# EAGLE board Xbee pcb (EAGLE 9.3.0)
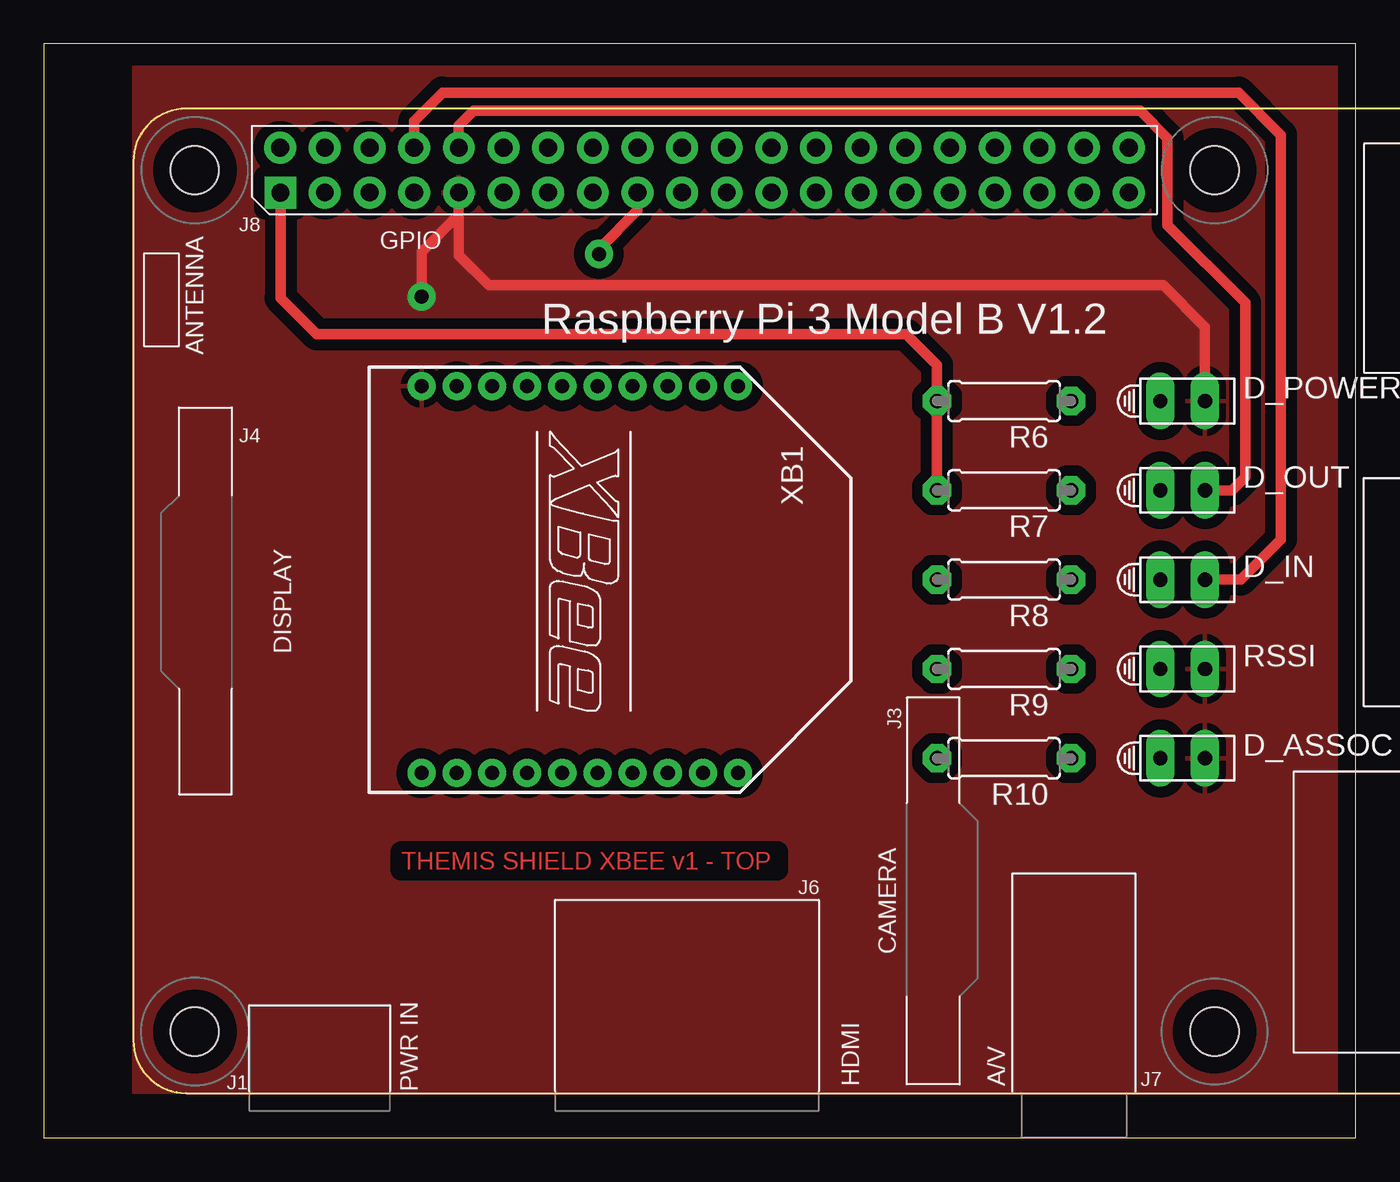
[diagram p0: board, top side]
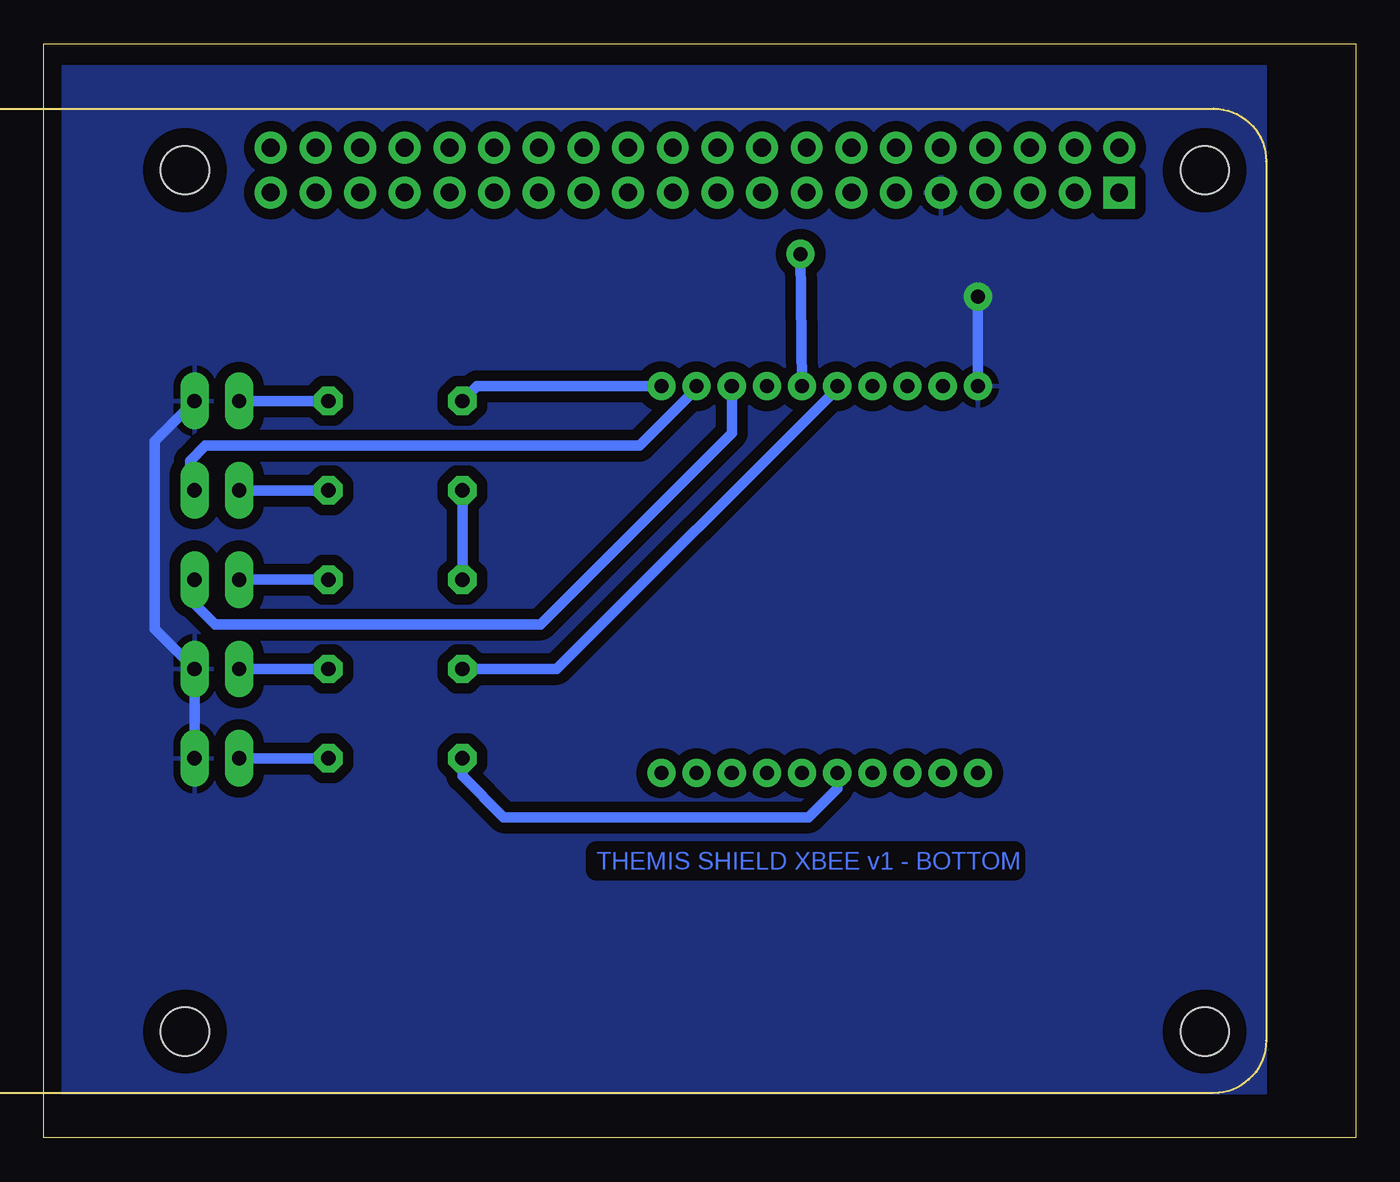
[diagram p1: board, bottom side, seen from below]

Size 74.6 x 62.22 mm. Coordinates in mm from the lower left corner, seen from the top.
Outline: 0,0 74.6,0 74.6,62.22 0,62.22 0,0
Copper layers (1*16): Top 0.035mm / dielectric 1.5mm / Bottom 0.035mm
Design rules "ENSEA_2019": minimum track width 0.4mm, minimum drill 0.6mm, track to track 0.4mm, track to pad 0.4mm, pad to pad 0.4mm, via to via 0.4mm, smd to smd 0.4mm, copper to edge 1mm, drill to drill 0.4mm, minimum pad ring 0.4mm, minimum via ring 0.4mm, stop-mask expansion 4mil, vias tented up to drill 0mil, thermal gap 0.4mm
Net classes: 0 default: width 0.203 mm

## Footprints (pad centres in the part's own frame; a part is rotated, then mirrored left to right if it is on the bottom)
HLMP6 = drill 0.813 long: A -1.27,0; K 1.27,0
RPI3 = drill 1.016 square: P$1 8.37,51.23 | drill 1.016: P$2 8.357,53.772; P$3 10.897,51.232; P$4 10.897,53.772; P$5 13.437,51.232; P$6 13.437,53.772; P$7 15.977,51.232; P$8 15.977,53.772; P$9 18.517,51.232; P$10 18.517,53.772; P$11 21.057,51.232; P$12 21.057,53.772; P$13 23.597,51.232; P$14 23.597,53.772; P$15 26.137,51.232; P$16 26.137,53.772; P$17 28.677,51.232; P$18 28.677,53.772; P$19 31.217,51.232; P$20 31.217,53.772; P$21 33.757,51.232; P$22 33.757,53.772; P$23 36.297,51.232; P$24 36.297,53.772; P$25 38.837,51.232; P$26 38.837,53.772; P$27 41.377,51.232; P$28 41.377,53.772; P$29 43.917,51.232; P$30 43.917,53.772; P$31 46.457,51.232; P$32 46.457,53.772; P$33 48.997,51.232; P$34 48.997,53.772; P$35 51.537,51.232; P$36 51.537,53.772; P$37 54.077,51.232; P$38 54.077,53.772; P$39 56.617,51.232; P$40 56.617,53.772 | hole 2.75: 3.5,3.5; 61.5,3.5; 3.5,52.5; 61.5,52.5
0207/7 = drill 0.813 octagon: 1 -3.81,0; 2 3.81,0
XBEE = drill 0.8 pad 1.27: 1 -11,9; 2 -11,7; 3 -11,5; 4 -11,3; 5 -11,1; 6 -11,-1; 7 -11,-3; 8 -11,-5; 9 -11,-7; 10 -11,-9; 11 11,-9; 12 11,-7; 13 11,-5; 14 11,-3; 15 11,-1; 16 11,1; 17 11,3; 18 11,5; 19 11,7; 20 11,9

## Placement (x,y rotation side)
D_ASSOC  HLMP6  [HLMP6]  64.77,21.59 0 top
D_IN  HLMP6  [HLMP6]  64.77,31.75 0 top
D_OUT  HLMP6  [HLMP6]  64.77,36.83 0 top
D_POWER  HLMP6  [HLMP6]  64.77,41.91 0 top
PCB1  RPI3RPI3  [RPI3]  5.08,2.54 0 top
R6  330  [0207/7]  54.61,41.91 180 top
R7  330  [0207/7]  54.61,36.83 180 top
R8  330  [0207/7]  54.61,31.75 180 top
R9  330  [0207/7]  54.61,26.67 180 top
R10  330  [0207/7]  54.61,21.59 180 top
RSSI  HLMP6  [HLMP6]  64.77,26.67 0 top
XB1  XBEE  [XBEE]  30.48,31.75 270 top

## Library data of the parts
D_ASSOC D_IN D_OUT D_POWER RSSI = display-hp; MF: AGILENT TECHNOLOGIES; MPN: HLMP-6500; OC_FARNELL: 1652490; OC_NEWARK: 40K0088
PCB1 = e14_Rpi3_RevA+mirror-pcb
R6-R10 = rcl; SPICEPREFIX: R
XB1 = maxstream; MPN: XBP24-Z7UIT-004; OC_FARNELL: 1751799; OC_NEWARK: 34R5507

## Nets
ASSOC: R10.2 XB1.15
DIN: D_IN.K PCB1.P$8 XB1.3
DOUT: D_OUT.K PCB1.P$10 XB1.2
GND: D_ASSOC.K D_POWER.K PCB1.P$9 RSSI.K XB1.10
N$5: PCB1.P$17 XB1.5
N$6: D_ASSOC.A R10.1
N$7: D_OUT.A R7.1
N$8: D_POWER.A R6.1
N$9: R9.1 RSSI.A
N$12: D_IN.A R8.1
RSSI: R9.2 XB1.6
VCC: PCB1.P$1 R6.2 R7.2 R8.2 XB1.1

## Tracks (layer width: path | path; a pad name or v marks a point on that pad's centre or on a via)
ASSOC
  Bottom 0.61: R10.2 50.8,20.57 48.45,18.23 31.11,18.23 29.48,19.86 XB1.15
DIN
  Top 0.61: PCB1.P$8 21.06,57.84 22.67,59.45 67.95,59.45 70.36,57.04 70.36,34.04 68.07,31.75 D_IN.K
  Bottom 0.61: D_IN.K 66.04,30.38 64.87,29.21 46.35,29.21 35.48,40.08 XB1.3
DOUT
  Top 0.61: PCB1.P$10 23.6,57.58 24.43,58.42 62.35,58.42 63.9,56.87 63.9,51.92 68.33,47.5 68.33,37.59 67.56,36.83 D_OUT.K
  Bottom 0.61: XB1.2 37.48,42.62 40.73,39.37 65.43,39.37 66.29,38.5 66.29,37.08 D_OUT.K
GND  (via drill 0.8)
  Top 0.61: D_POWER.K 66.04,46.12 63.67,48.49 25.32,48.49 23.6,50.22 PCB1.P$9 23.6,52.5 21.48,50.38 v21.48,47.84
  Bottom 0.61: v21.48,47.84 XB1.10 | D_POWER.K 68.31,39.64 68.31,28.94 RSSI.K D_ASSOC.K
  pour Top (isolate 0.61): 5.08,60.96 73.66,60.96 73.66,2.54 5.08,2.54
  pour Bottom (isolate 0.61): 5.08,60.96 73.66,60.96 73.66,2.54 5.08,2.54
N$5  (via drill 0.8)
  Top 0.61: PCB1.P$17 33.76,52.76 31.56,50.56 v31.56,50.28
  Bottom 0.61: v31.56,50.28 XB1.5
N$6
  Bottom 0.61: D_ASSOC.A R10.1
N$7
  Bottom 0.61: D_OUT.A R7.1
N$8
  Bottom 0.61: D_POWER.A R6.1
N$9
  Bottom 0.61: RSSI.A R9.1
N$12
  Bottom 0.61: D_IN.A R8.1
RSSI
  Bottom 0.61: R9.2 45.43,26.67 29.48,42.62 XB1.6
VCC
  Top 0.61: R7.2 R6.2 50.8,43.94 49.04,45.7 15.51,45.7 13.45,47.76 PCB1.P$1
  Bottom 0.61: R6.2 49.96,42.75 XB1.1 | R7.2 R8.2

## Text on the board
Top: THEMIS SHIELD XBEE v1 - TOP
Bottom: THEMIS SHIELD XBEE v1 - BOTTOM